# Altium PCB PCB.PcbDoc
Units mm, origin at the board's own origin, x right, y up, seen from the top; angles counter-clockwise.
Board outline 37.5 x 65 mm, 2 copper layers (Top Layer, Bottom Layer); 11 components, 8 nets, 45 pads, 0 vias.
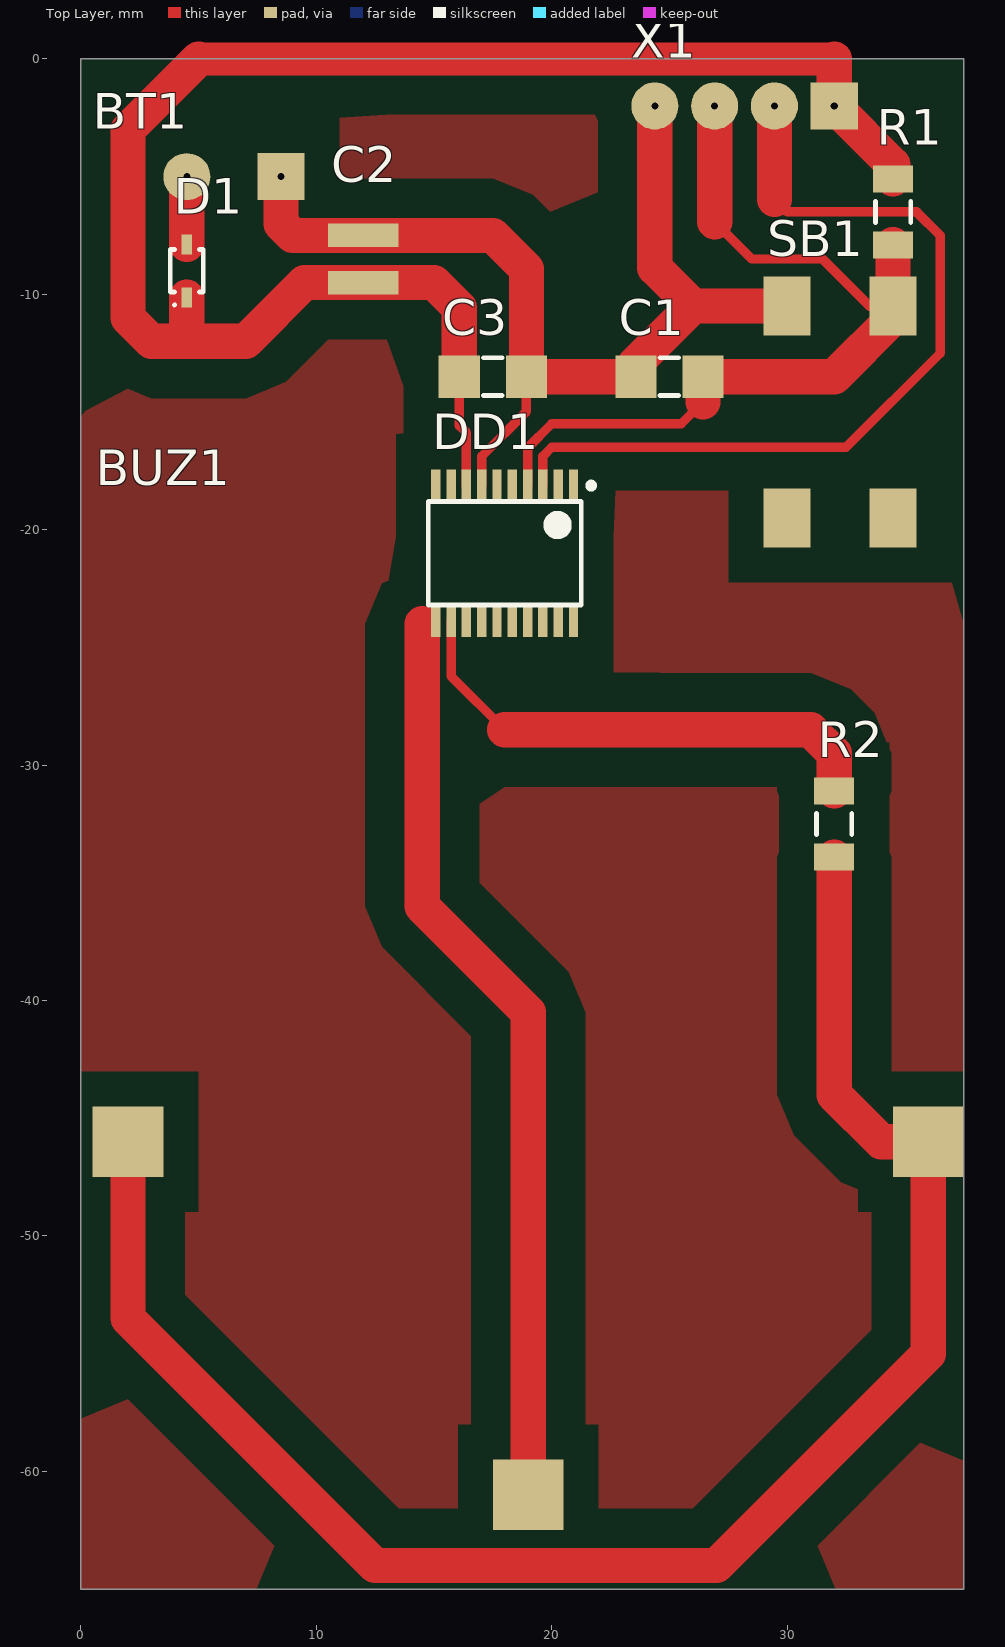
[diagram p0: Top Layer view]
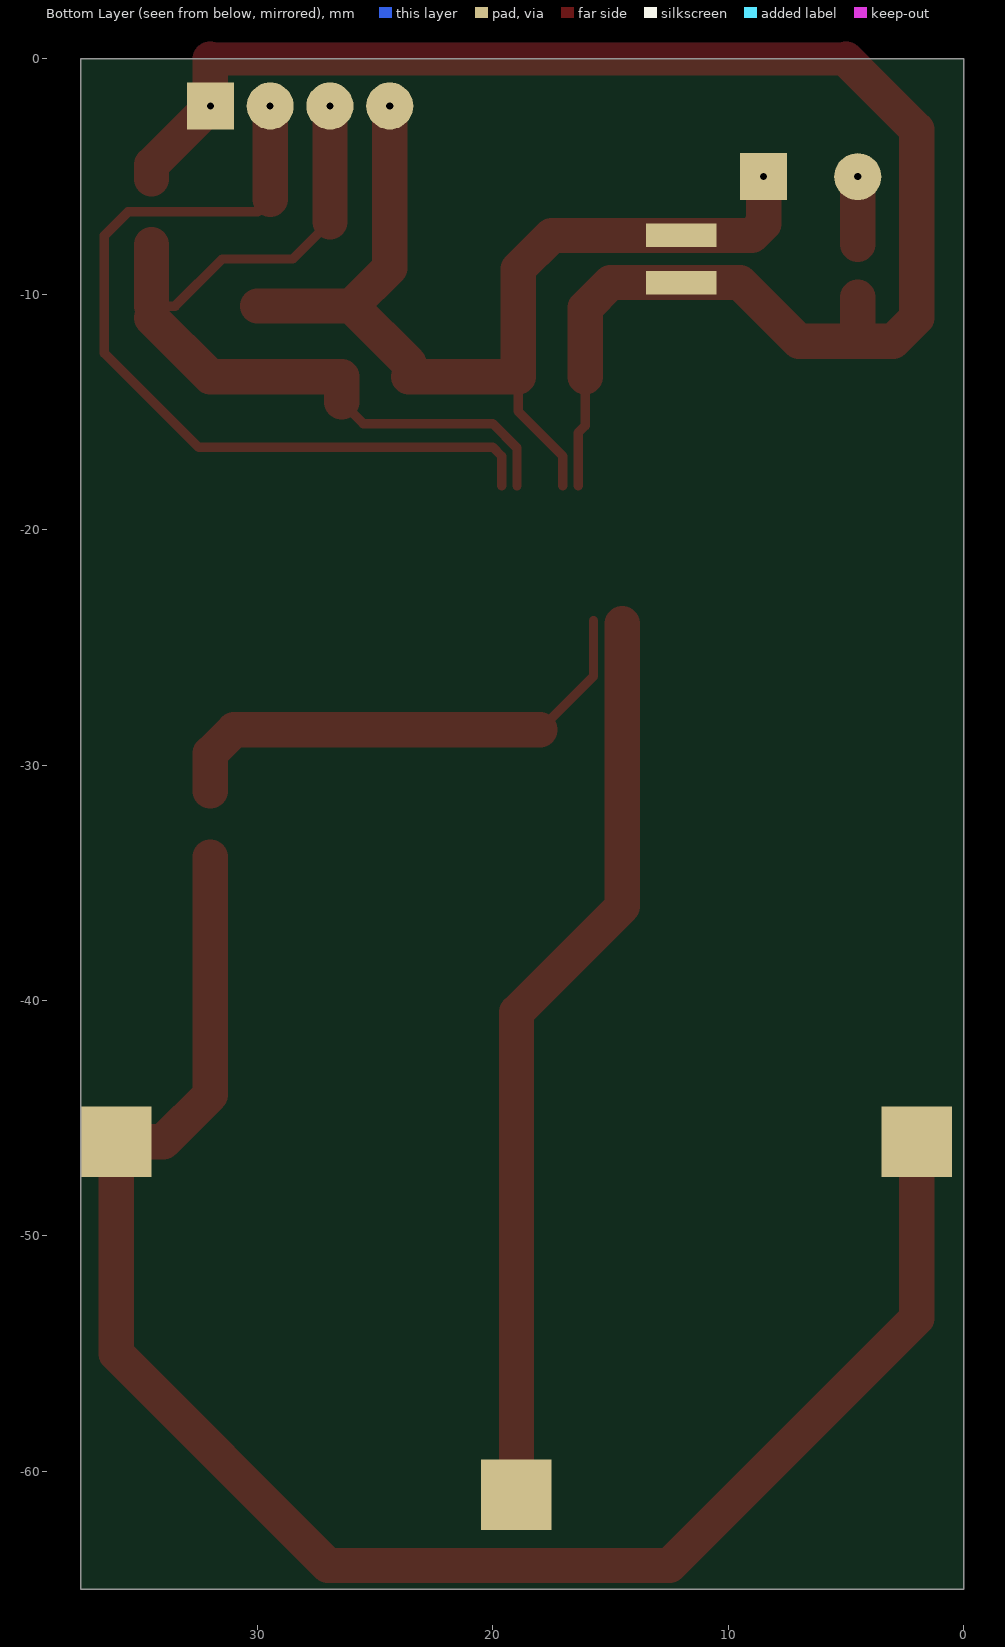
[diagram p1: Bottom Layer view, seen from below]

## Layer stack, top to bottom
Top Solder: solder mask 0.0102, Solder Resist, Dk 3.5
Top Layer: signal copper 0.0356
Dielectric 1: dielectric 0.32, FR-4, Dk 4.8
Bottom Layer: signal copper 0.0356
Bottom Solder: solder mask 0.0102, Solder Resist, Dk 3.5

## Board outline
0,-65 0,0 37.5,0 37.5,-65

## Design rules (kind name [scope] priority, off if disabled: settings)
Clearance [All] p1: gap=0.2
PolygonConnect [All] p1: connectstyle=Relief reliefconductorwidth=0.254 reliefentries=4 polygonreliefangle="90 Angle" airgapwidth=0.254
RoutingVias [All] p1: holewidth=0.711 width=1.27 viastyle="Through Hole" minholewidth=0.711 minwidth=1.27 maxholewidth=0.711 maxwidth=1.27
SolderMaskExpansion [All] p1: expansion=0.102
Width [All] p1: maxlimit=10 minlimit=0.1 preferedwidth=0.4
30 further rules are at their usual default settings.

## Components (designator, comment, footprint, x,y, rotation, side; value= is the part's Value field where it differs from the comment)
BT1 "3.7V" Battery 0.5,-4 r0 top locked
BUZ1 "Buzzer" Buzzer 19,-36 r0 top locked
C1 "Capacitor" "CAPACITOR SMD 1206" 25,-13.5 r0 top
C2 "Capacitor (Polarized)" BigCapacitor 12,-7.5 r270 top
C3 "Capacitor" "CAPACITOR SMD 1206" 17.5,-13.5 r0 top
D1 "Diode" SODFL250X110-2N 4.5,-9 r90 top
DD1 "STM8L051F3P6" TSOP65P640X120-20N 18,-21 r270 top
R1 "Resistor (0.05W)" "Resistor SMD 1206" 34.5,-6.5 r270 top
R2 "Resistor (0.05W)" "Resistor SMD 1206" 32,-32.5 r270 top
SB1 "Button" "BUTTON SMD" 30,-10.5 r0 top
X1 "SWIM_Connector" "SWIM Connector" 32,-2 r180 top

## Footprints (in the part's own frame and the unit in brackets; to place one, negate y for a bottom-side part, rotate by r counter-clockwise, add the part's x,y. Pads: shape width x height; smd on the part's side, far side on the other; paste and mask are expansions set on the pad)
Battery [mm]
  round 2 hole 0.3: 1(4,-1)
  rect 2x2 hole 0.3: 2(8,-1)
  body extent 0,-60 37,0, height 5
BigCapacitor [mm]
  rect 1x3 all layers, no hole: 1(0,0) 2(2,0)
  body extent -1.5,3 3.5,14, height 5.2
"BUTTON SMD" [mm]
  rect 2x2.5 smd: 1(0,0) 2(4.5,0) 3(0,-9) 4(4.5,-9)
  body extent -0.72,-9.45 5.28,0.55, height 5.15
Buzzer [mm]
  rect 3x3 all layers, no hole: 1(-17,-10) 2(17,-10) 3(0,-25)
  body extent -17,-17 17,17, height 6.5
"CAPACITOR SMD 1206" [mm]
  rect 1.75x1.8 smd: 1(-1.425,0) 2(1.425,0)
  silkscreen extent -0.4,-0.8 0.4,0.8, body extent -1.7,-0.9 1.7,0.9, height 1.85
"Resistor SMD 1206" [mm] "Chip Resistor, 2-Leads, Body 3,10x1,55mm, IPC Medium Density"
  rect 1.15x1.7 smd: 1(-1.4,0) 2(1.4,0)
  silkscreen extent -0.45,-0.75 0.45,0.75, body extent -1.63,-0.85 1.63,0.85, height 0.65
SODFL250X110-2N [mm] "SODFL, 2-Leads, Body 1,25x2,50mm, IPC Medium Density"
  rect 0.85x0.45 smd: 1(-1.125,0) 2(1.125,0)
  silkscreen extent -1.5,-0.7 0.9,0.7, body extent -1.25,-0.67 1.25,0.68, height 1.1
"SWIM Connector" [mm]
  rect 2x2 hole 0.3 unplated: 1(0,0)
  round 2 hole 0.3 unplated: 2(2.54,0) 3(5.08,0) 4(7.62,0)
  body extent -1.27,-1.27 8.89,1.27, height 8.99
TSOP65P640X120-20N [mm] "TSOP, 20-Leads, Body 6,50x4,40mm, Pitch 0,65mm, IPC Medium Density"
  rect 1.35x0.4 smd: 1(-2.875,2.925) 2(-2.875,2.275) 3(-2.875,1.625) 4(-2.875,0.975) 5(-2.875,0.325) 6(-2.875,-0.325) 7(-2.875,-0.975) 8(-2.875,-1.625) 9(-2.875,-2.275) 10(-2.875,-2.925) 11(2.875,-2.925) 12(2.875,-2.275) 13(2.875,-1.625) 14(2.875,-0.975) 15(2.875,-0.325) 16(2.875,0.325) 17(2.875,0.975) 18(2.875,1.625) 19(2.875,2.275) 20(2.875,2.925)
  silkscreen extent -3,-3.25 2.2,3.8, body extent -3.2,-3.3 3.2,3.3, height 1.2

## Part data
BT1: library part Battery
DD1: library part "STM8L051F3P6 (TSSOP-20)"

## Nets (pads, with @x,y where several pads share a name; then routed paths per layer and width w, separated by ;. In a path a pad name is that pad's centre, name@x,y a point inside that pad or via, vN(x,y) a via of type N, cw(c..) or ccw(c..) an arc to the next point about the centre after c; other vN are vias at no path point)
GND: BT1.2 C1.1 C2.1 C3.2 DD1.7 SB1.1 X1.4 | length 45
  Top Layer w0.4: DD1.7 17.025,-16.875 18.925,-14.975 C3.2 ; C1.1 C1.1@23.575,-12.925
  Top Layer w1.5: BT1.2 8.5,-7 9,-7.5 C2.1 17.5,-7.5 18.925,-8.925 C3.2 C1.1 ; C1.1@23.575,-12.925 26,-10.5 ; X1.4 24.38,-8.88 26,-10.5 ; SB1.1 26,-10.5
NetBT1_1: BT1.1 D1.2 | length 2.9
  Top Layer w1.5: D1.2 BT1.1
NetBUZ1_1: BUZ1.1 BUZ1.2 R2.2 | length 73.5
  Top Layer w1.5: BUZ1.1 2,-53.5 12.5,-64 27,-64 36,-55 BUZ1.2 34,-46 32,-44 R2.2
NetBUZ1_3: BUZ1.3 DD1.11 | length 38.9
  Top Layer w1.5: 14.5,-24 14.5,-36 19,-40.5 BUZ1.3
NetC1_2: C1.2 DD1.4 R1.2 SB1.2 X1.3 | length 37.1
  Top Layer w0.4: DD1.4 18.975,-16.525 20,-15.5 25.5,-15.5 26.425,-14.575 ; 26.92,-6.92 28.5,-8.5 31.5,-8.5 33.5,-10.5 SB1.2 SB1.2@34.5,-11
  Top Layer w1.5: 26.425,-14.575 C1.2 32,-13.5 SB1.2@34.5,-11 ; 26.92,-6.92 X1.3 ; SB1.2 R1.2
NetDD1_3: DD1.3 X1.2 | length 36.6
  Top Layer w0.4: DD1.3 19.625,-16.875 20,-16.5 32.5,-16.5 36.5,-12.5 36.5,-7.5 35.5,-6.5 30,-6.5 29.46,-5.96
  Top Layer w1.5: 29.46,-5.96 X1.2
NetDD1_12: DD1.12 R2.1 | length 21.6
  Top Layer w0.4: DD1.12 15.725,-26.225 18,-28.5
  Top Layer w1.5: 18,-28.5 31,-28.5 32,-29.5 R2.1
VDD: C2.2 C3.1 D1.1 DD1.8 R1.1 X1.1 | length 70.9
  Top Layer w0.4: 4.425,-12 4.5,-11.925 ; C3.1 16.075,-15.575 16.375,-15.875 DD1.8
  Top Layer w1.4: 5,0 32,0
  Top Layer w1.5: 4.5,-11.925 D1.1 ; 5,0 2,-3 2,-11 3,-12 4.425,-12 7,-12 9.5,-9.5 C2.2 15,-9.5 16.075,-10.575 C3.1 ; 32,0 X1.1 34.5,-4.5 R1.1
pads on no net: DD1.1 DD1.2 DD1.5 DD1.6 DD1.9 DD1.10 DD1.13 DD1.14 DD1.15 DD1.16 DD1.17 DD1.18 DD1.19 DD1.20 SB1.3 SB1.4

## Polygon pours and split planes (outlines as drawn)
no net on Top Layer "Top Layer-No Net" (solid, pour order 18): 37.5,-65 0,-65 0,1.5 37.5,1.5